# Altium PCB MSW_V2.PcbDoc
Units mil, origin at the board's own origin, x right, y up, seen from the top; angles counter-clockwise.
Board outline 1575 x 1330 mil, 2 copper layers (Top Layer, Bottom Layer); 79 components, 42 nets, 260 pads, 33 vias.
Unrouted connection lines stored in the file: 63.
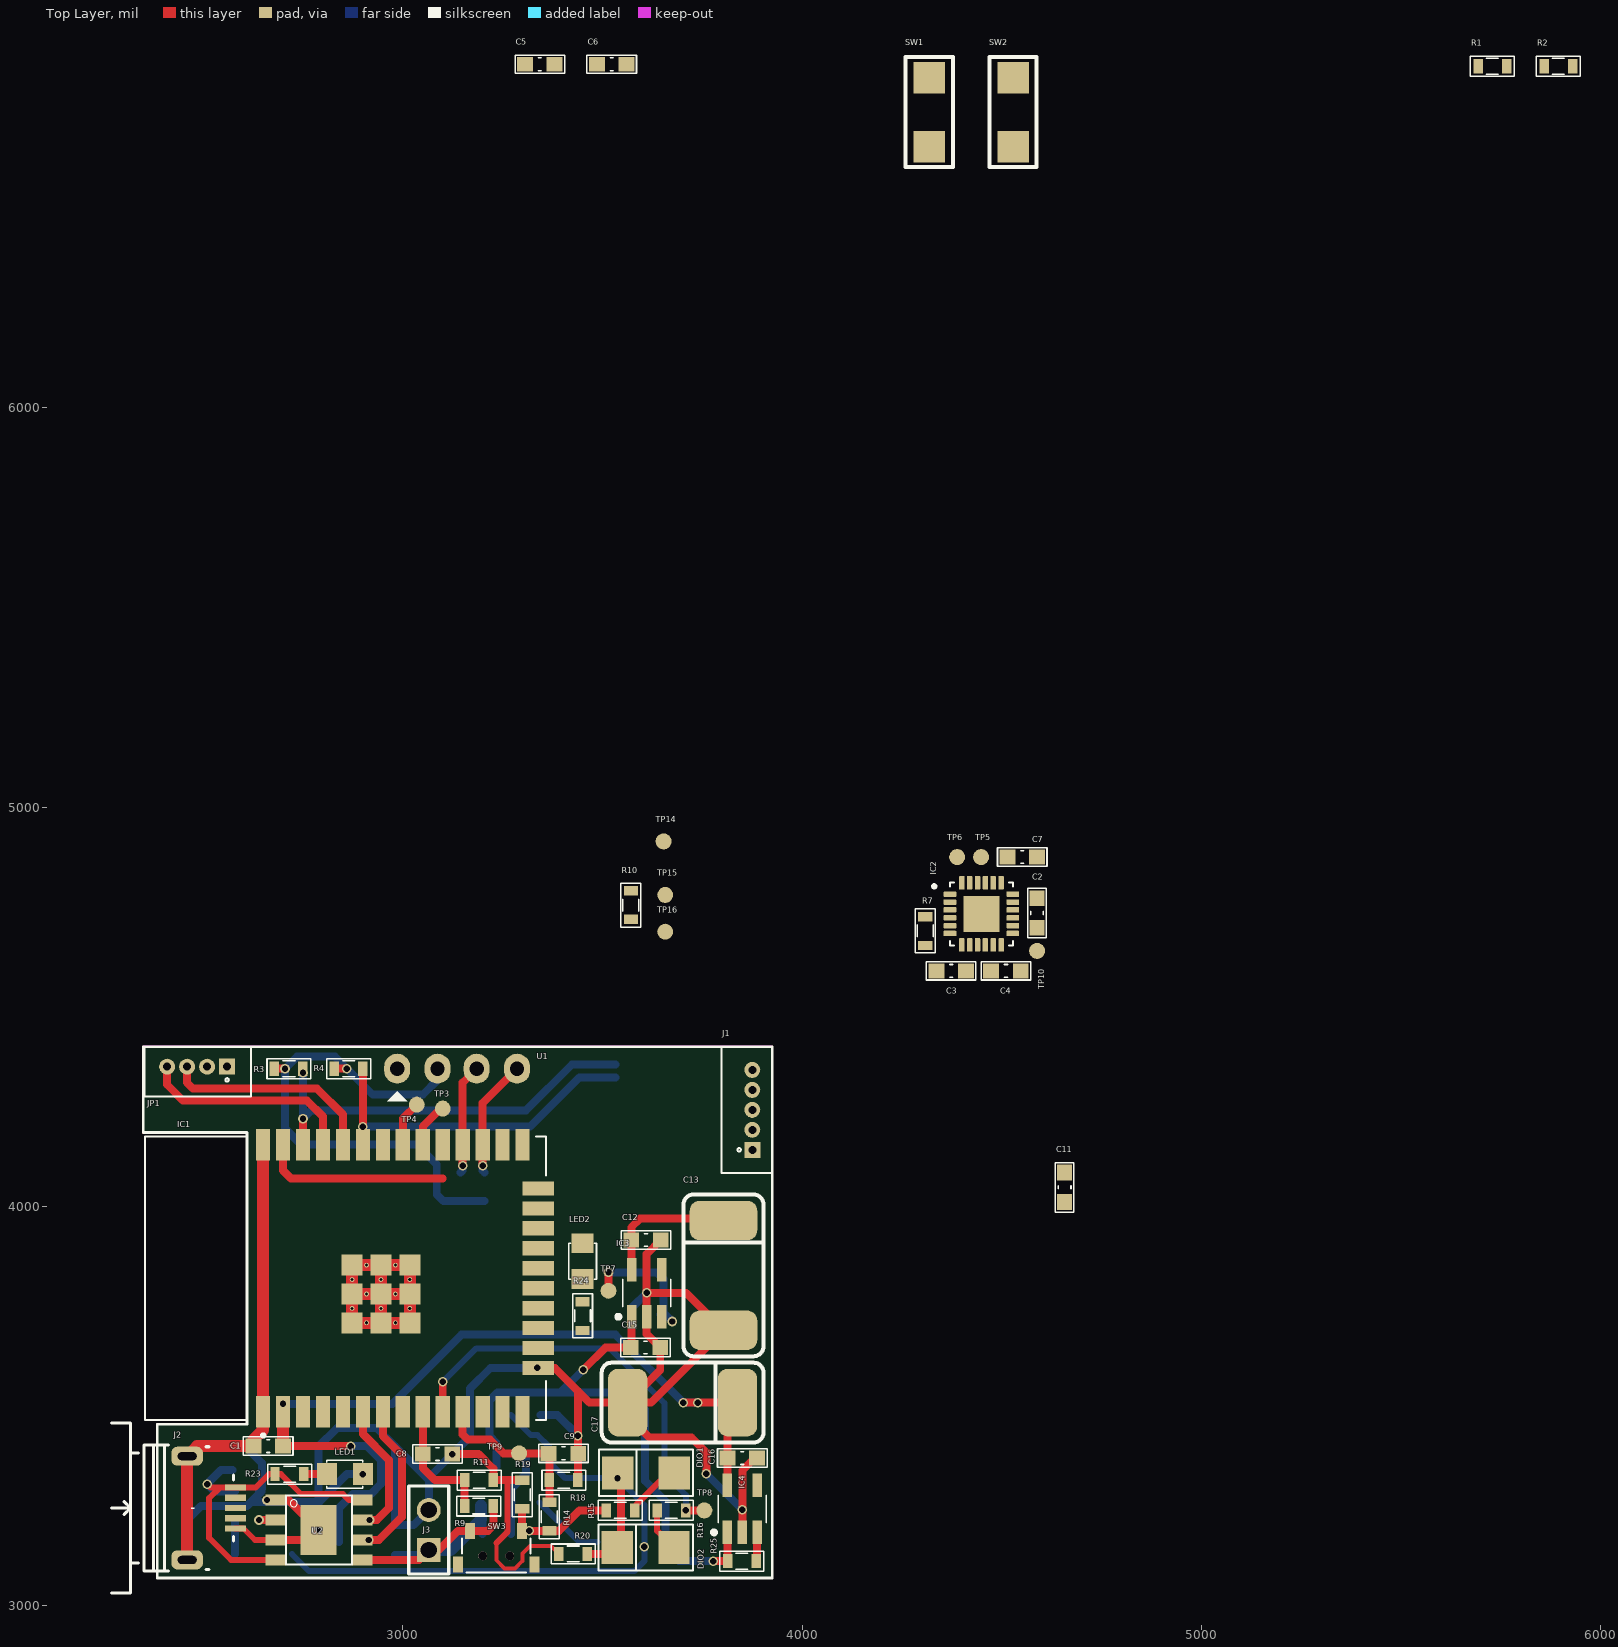
[diagram p0: Top Layer view]
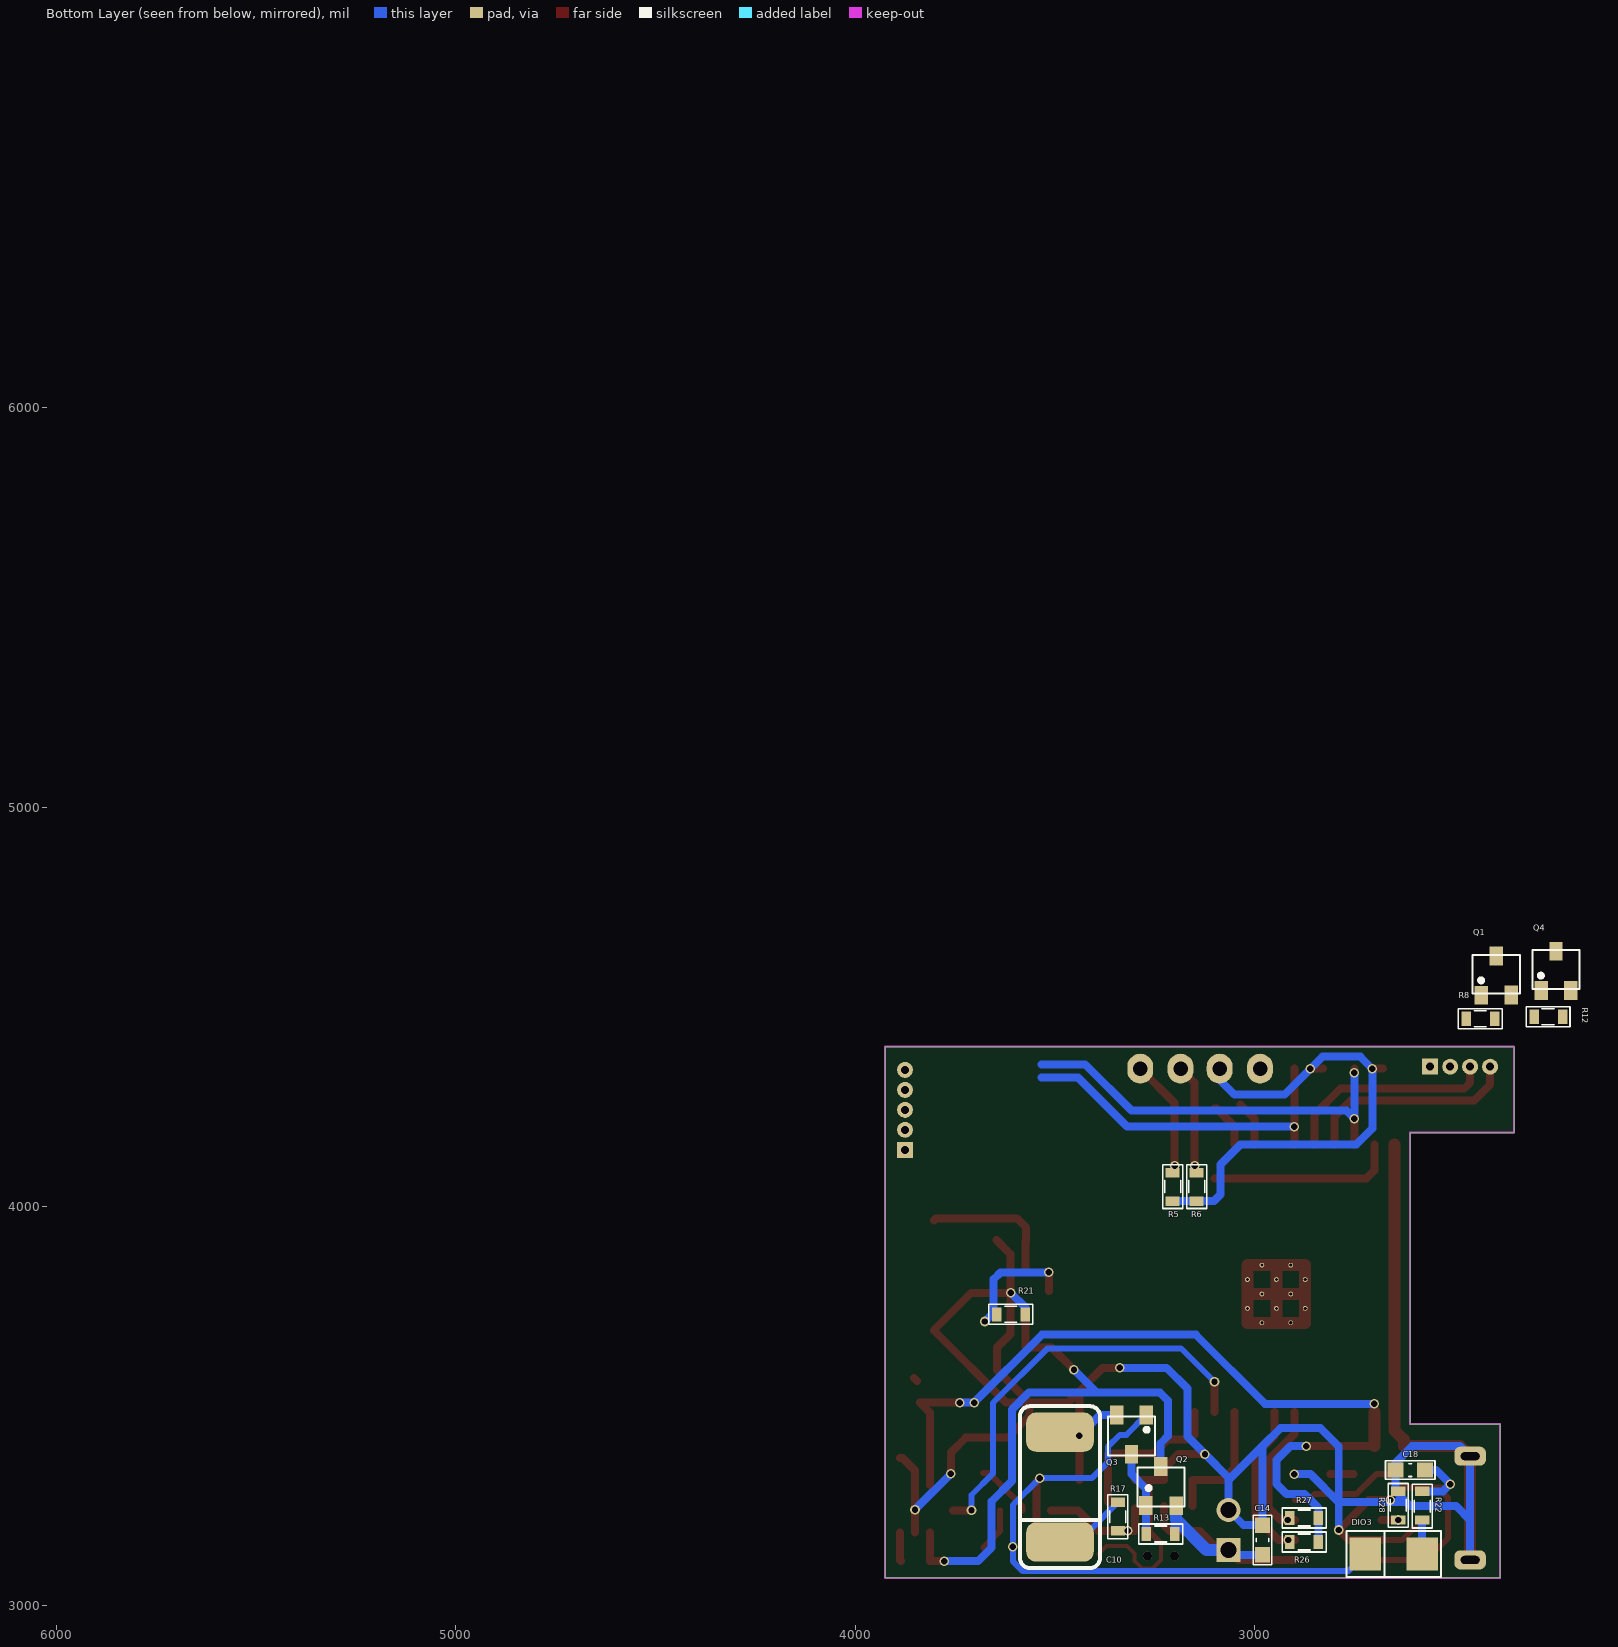
[diagram p1: Bottom Layer view, seen from below]

## Layer stack, top to bottom
Top Solder: solder mask 0.4, Solder Resist, Dk 3.5
Top Layer: signal copper 1.4
Dielectric 1: dielectric 12.6, FR-4, Dk 4.8
Bottom Layer: signal copper 1.4
Bottom Solder: solder mask 0.4, Solder Resist, Dk 3.5

## Board outline
2350,4185 2350,4400 3925,4400 3925,3070 2385,3070 2385,3455 2610,3455 2610,4185

## Design rules (kind name [scope] priority, off if disabled: settings)
Clearance [All] p1: gap=20 ignorepadtopadclearanceinfootprint=TRUE except(0: Arc-Hole Track-Hole SMDPad-Hole THPad-Hole Via-Hole Fill-Hole Poly-Hole Region-Hole Text-Hole; 1: Arc-Text Track-Text SMDPad-Text THPad-Text Via-Text Fill-Text Poly-Text Region-Text Text-Text; 7: Arc-Arc Arc-Track Track-Track; 10: Arc-SMDPad Track-SMDPad SMDPad-SMDPad; 15: Arc-THPad Arc-Via Track-THPad Track-Via SMDPad-THPad SMDPad-Via THPad-THPad THPad-Via Via-Via)
PolygonConnect [All] p1: connectstyle=Relief reliefconductorwidth=15 reliefentries=4 polygonreliefangle="45 Angle" airgapwidth=10
RoutingVias [All] p1: holewidth=16 width=24 viastyle="Through Hole" minholewidth=16 minwidth=24 maxholewidth=16 maxwidth=24
SolderMaskExpansion [All] p1: expansion=4 istentingtop=FALSE
Width [All] p1: maxlimit=40 minlimit=10 preferedwidth=20
30 further rules are at their usual default settings.

## Components (designator, comment, footprint, x,y, rotation, side; value= is the part's Value field where it differs from the comment)
C1 "10uF" CAP_0603 2663,3400 r0 top value=33p
C2 "100nF" CAP_0603 4588,4735 r270 top value=33p
C3 "10nF" CAP_0603 4373,4590 r0 top value=33p
C4 "100nF" CAP_0603 4510,4590 r180 top value=33p
C5 "10uF" CAP_0603 3343.06,6860 r0 top value=33p
C6 "10uF" CAP_0603 3523.06,6860 r0 top value=33p
C7 "2.2nF" CAP_0603 4551,4875 r180 top value=33p
C8 "10uF" CAP_0603 3087,3380 r180 top value=33p
C9 "10uF" CAP_0603 3402,3382 r180 top value=33p
C10 "220uF/10V" CAP_7343 3487,3295 r90 bottom
C11 "10uF" CAP_0603 4657,4048 r90 top value=33p
C12 "10uF" CAP_0603 3609,3916 r180 top value=33p
C13 "220uF/10V" CAP_7343 3803,3830 r270 top
C14 "10uF" CAP_0603 2980,3165 r270 bottom value=33p
C15 "10uF" CAP_0603 3607.6,3647.06 r180 top value=33p
C16 "10uF" CAP_0603 3850,3370 r180 top value=33p
C17 "220uF/10V" CAP_7343 3703,3509 r180 top
C18 "10uF" CAP_0603 2610,3340 r180 bottom value=33p
DIO1 "SS34" DIO-214AC(SMA) 3606,3335 r0 top value=1N5007
DIO2 "SS34" DIO-214AC(SMA) 3605,3148 r0 top value=1N5007
DIO3 "SS34" DIO-214AC(SMA) 2654,3132 r180 bottom value=1N5007
IC1 "ESP32-WROOM-32" MODULE_ESP32-WROOM-32 2857.09,3820.35 r90 top
IC2 "MPU6050" QFN24 4448.79,4732.76 r0 top
IC3 "RT9013" SOT23-5 3610.6,3783.06 r90 top
IC4 "RT9013" SOT23-5 3850,3243.06 r90 top
J1 "JP5" "Header5 - TH - 1.25MM" 3875,4142 r90 top
J2 "USB-5" USB-M4 2460,3245 r270 top
J3 "JP2" JP2-C1T 3065,3140 r90 top
JP1 "JP4" "Header4 - TH - 1.25MM" 2560,4350 r180 top
LED1 "LED" LED-0805-Red 2810,3330 r0 top value="LED 3 ly Single Colour"
LED2 "LED" LED-0805-Blue 3450,3818 r90 top value="LED 3 ly Single Colour"
Q1 "2SC1815" SOT23D 2394.5,4578.16 r180 bottom value=C1815
Q2 "AO3401" SOT23A 3235,3300 r180 bottom
Q3 "2SC1815" SOT23D 3308,3429 r0 bottom value=C1815
Q4 "2SC1815" SOT23D 2245,4590 r180 bottom value=C1815
R1 "10k" RES-SMD-0603 5728.06,6855 r0 top
R2 "10k" RES-SMD-0603 5893.06,6855 r0 top
R3 "10k" RES-SMD-0603 2715,4345 r180 top
R4 "10k" RES-SMD-0603 2865,4345 r180 top
R5 "10k" RES-SMD-0603 3205,4050 r270 bottom
R6 "10k" RES-SMD-0603 3145,4050 r270 bottom
R7 "10k" RES-SMD-0603 4308,4690 r270 top
R8 "10k" RES-SMD-0603 2435,4470 r180 bottom
R9 "500k" RES-SMD-0603 3190,3250 r0 top
R10 "10k" RES-SMD-0603 3571,4754 r90 top
R11 "1M5" RES-SMD-0603 3191.49,3315 r180 top
R12 "10k" RES-SMD-0603 2265,4475 r180 bottom
R13 "150k" RES-SMD-0603 3235,3180 r0 bottom
R14 "500k" RES-SMD-0603 3367,3223 r90 top
R15 "10k" RES-SMD-0603 3544.51,3239 r0 top
R16 "10k" RES-SMD-0603 3672,3239 r0 top
R17 "150k" RES-SMD-0603 3342,3223 r90 bottom
R18 "1M5" RES-SMD-0603 3403.48,3315.01 r180 top
R19 "150k" RES-SMD-0603 3299,3278.51 r90 top
R20 "150k" RES-SMD-0603 3427,3130 r180 top
R21 "150k" RES-SMD-0603 3610,3730 r180 bottom
R22 "10k" RES-SMD-0603 2580,3250 r90 bottom
R23 "2k" RES-SMD-0603 2716.49,3330 r180 top
R24 "2k" RES-SMD-0603 3450,3726 r270 top
R25 "150k" RES-SMD-0603 3849,3112 r0 top
R26 "150k" RES-SMD-0603 2875,3160 r0 bottom
R27 "150k" RES-SMD-0603 2875,3220 r0 bottom
R28 "1k2" RES-SMD-0603 2640,3251.49 r270 bottom
SW1 "SW" "SW 3x2x4" 4318.06,6740 r90 top value="SW chip 2 pin"
SW2 "SW" "SW 3x2x4" 4528.06,6740 r90 top value="SW chip 2 pin"
SW3 "SW" "BUTTON 2P SMD SIDE 2x4x3.5" 3234,3125 r0 top value="SW chip 2 pin"
TP3 "TP" TP_SMD 3100,4245 r90 top
TP4 "TP" TP_SMD 3035,4255 r90 top
TP5 "TP" TP_SMD 4448,4875 r90 top
TP6 "TP" TP_SMD 4388,4875 r90 top
TP7 "TP" TP_SMD 3515,3789 r90 top
TP8 "TP" TP_SMD 3755,3239 r90 top
TP9 "TP" TP_SMD 3291,3382 r90 top
TP10 "TP" TP_SMD 4588,4640 r90 top
TP14 "TP" TP_SMD 3653,4914 r180 top
TP15 "TP" TP_SMD 3657,4780 r180 top
TP16 "TP" TP_SMD 3657,4688 r180 top
U1 "SSD1306" "OLED 1.3 SSD1306 NON POLE" 3138.91,3755.02 r0 top locked
U2 "TP4056" TP4056 2790,3190 r0 top

## Footprints (in the part's own frame and the unit in brackets; to place one, negate y for a bottom-side part, rotate by r counter-clockwise, add the part's x,y. Pads: shape width x height; smd on the part's side, far side on the other; paste and mask are expansions set on the pad)
"BUTTON 2P SMD SIDE 2x4x3.5" [mil]
  round 22 hole 22: 0(-34,0) 0(34,0)
  rect 25x40 smd: 1(65,63) 2(-66,63) 3(-96,-21) 3(96,-21)
  silkscreen extent -86,-42 86,44, body extent -93,-83 93,61, height 76
CAP_0603 [mm]
  rect 1x0.95 smd mask+0.076: 1(-0.94,0) 2(0.94,0)
  silkscreen extent -1.57,-0.58 1.57,0.58, body extent -0.77,-0.39 0.83,0.41, height 0.9
CAP_7343 [mm] "Capacitor Tantalum 7343"
  rrect50% 2.5x4.3 smd: 1(-3.429,0) 2(3.556,0)
  silkscreen extent -5.08,-2.54 5.21,2.54, body extent -3.75,-2.14 3.75,2.16, height 2.8
DIO-214AC(SMA) [mm] "DO-214AC Diode Smallest Size"
  rect 2x2.1 smd: 1(1.88,-0.051) 2(-1.732,-0.051)
  silkscreen extent -2.92,-1.52 3.07,1.42, body extent -2.5,-1.35 2.7,1.25, height 2.4
"Header4 - TH - 1.25MM" [mil] "CON4"
  rect 40x40 hole 20: 1(0,0)
  round 40 hole 20: 2(50,0) 3(100,0) 4(150,0)
  silkscreen extent -60,-50 207,75, body extent -59,-50 206,76, height 185
"Header5 - TH - 1.25MM" [mil] "CON5"
  rect 40x40 hole 20: 1(0,0)
  round 40 hole 20: 2(50,0) 3(100,0) 4(150,0) 5(200,0)
  silkscreen extent -58,-49 258,77, body extent -57,-49 257,77, height 185
JP2-C1T [mm] "2 row, straight, gold plating"
  rect 1.52x1.52 hole 1.02: 1(0,0)
  round 1.52 hole 1.02: 2(2.54,0)
  silkscreen extent -1.52,-1.27 4.06,1.27, body extent -1.52,-1.25 4.06,1.25, height 8.51
LED-0805-Blue [mil]
  rect 50x55 smd: 1(0,0) 2(90,0)
  silkscreen extent 0,-35 90,35, body extent 5,-25 85,25, height 43
LED-0805-Red [mil]
  rect 50x55 smd: 1(0,0) 2(90,0)
  silkscreen extent 0,-35 90,35, body extent 5,-25 85,25, height 43
MODULE_ESP32-WROOM-32 [mm]
  rect 2x0.9 smd: 1(-8.5,5.26) 2(-8.5,3.99) 3(-8.5,2.72) 4(-8.5,1.45) 5(-8.5,0.18) 6(-8.5,-1.09) 7(-8.5,-2.36) 8(-8.5,-3.63) 9(-8.5,-4.9) 10(-8.5,-6.17) 11(-8.5,-7.44) 12(-8.5,-8.71) 13(-8.5,-9.98) 14(-8.5,-11.25) 25(8.5,-11.25) 26(8.5,-9.98) 27(8.5,-8.71) 28(8.5,-7.44) 29(8.5,-6.17) 30(8.5,-4.9) 31(8.5,-3.63) 32(8.5,-2.36) 33(8.5,-1.09) 34(8.5,0.18) 35(8.5,1.45) 36(8.5,2.72) 37(8.5,3.99) 38(8.5,5.26)
  rect 0.9x2 smd: 15(-5.715,-12.25) 16(-4.445,-12.25) 17(-3.175,-12.25) 18(-1.905,-12.25) 19(-0.635,-12.25) 20(0.635,-12.25) 21(1.905,-12.25) 22(3.175,-12.25) 23(4.445,-12.25) 24(5.715,-12.25)
  rect 1.33x1.33 smd: 39_1(-2.835,-0.405) 39_2(-1,-0.405) 39_3(0.835,-0.405) 39_4(-2.835,-2.24) 39_5(-1,-2.24) 39_6(0.835,-2.24) 39_7(-2.835,-4.075) 39_8(-1,-4.075) 39_9(0.835,-4.075)
  round 0.3 hole 0.2: 39_10(-1.917,-0.405) 39_11(-0.082,-0.405) 39_12(-2.835,-1.322) 39_13(-1,-1.322) 39_14(0.835,-1.322) 39_15(-1.917,-2.24) 39_16(-0.082,-2.24) 39_17(-2.835,-3.157) 39_18(-1,-3.157) 39_19(0.835,-3.157) 39_20(-1.917,-4.075) 39_21(-0.082,-4.075)
  silkscreen extent -10.1,-12.75 9,12.75, body extent -9.02,-12.75 8.98,12.75, height 3.2
"OLED 1.3 SSD1306 NON POLE" [mil]
  oval 65x75 hole 36: 1(-152.91,589.98) 2(-51.91,589.98) 3(46.09,589.98) 4(147.09,589.98)
  silkscreen extent -178,509 -128,534, body extent -659,-687 660,640, height 553
QFN24 [mm]
  rrect25% 0.8x0.35 smd: 1(-2,1.25) 2(-2,0.75) 3(-2,0.25) 4(-2,-0.25) 5(-2,-0.75) 6(-2,-1.25) 13(2,-1.25) 14(2,-0.75) 15(2,-0.25) 16(2,0.25) 17(2,0.75) 18(2,1.25)
  rrect25% 0.35x0.85 smd: 7(-1.25,-1.975) 8(-0.75,-1.975) 9(-0.25,-1.975) 10(0.25,-1.975) 11(0.75,-1.975) 12(1.25,-1.975) 19(1.25,1.975) 20(0.75,1.975) 21(0.25,1.975) 22(-0.25,1.975) 23(-0.75,1.975) 24(-1.25,1.975)
  rect 2.286x2.286 smd paste-2: 25(0,0)
  silkscreen extent -3.1,-2 2,2, body extent -2,-2.01 2.01,2.01, height 0.9
RES-SMD-0603 [mm]
  rect 0.6x0.9 smd: 1(-0.889,0) 2(0.927,0)
  silkscreen extent -1.4,-0.64 1.4,0.64, body extent -0.8,-0.4 0.8,0.4, height 0.43
SOT23-5 [mm] "SOT23, 5-Leads, Body 3.0x3.0mm (max), Pitch 0.95mm, IPC Medium Density"
  rect 1.5x0.6 smd: 1(-1.5,0.95) 2(-1.5,0) 3(-1.5,-0.95) 4(1.5,-0.95) 5(1.5,0.95)
  silkscreen extent -1.62,-1.52 0.87,1.92, body extent -1.75,-1.52 1.75,1.53, height 1.45
SOT23A [mm] "SOT 23A"
  rect 0.85x1.2 smd: 1(-0.94,-1.245) 2(0.005,1.25) 3(0.985,-1.25)
  silkscreen extent -1.47,-1.3 1.52,1.17, body extent -1.5,-1.3 1.5,1.2, height 1.06
SOT23D [mm] "SOT 23C - 1-3-2 - BCE"
  rect 0.85x1.2 smd: 1(-0.95,-1.25) 2(0.94,-1.245) 3(0,1.25)
  silkscreen extent -1.5,-1.14 1.5,1.32, body extent -1.5,-1.17 1.5,1.33, height 1.06
"SW 3x2x4" [mm]
  rect 2x2 smd: 1(-2.2,0) 2(2.2,0)
  silkscreen extent -3.5,-1.5 3.5,1.5, body extent -2.45,-1.45 2.45,1.45, height 2
TP4056 [mm]
  rect 1.3x0.7 smd: 1(-2.75,1.905) 2(-2.75,0.635) 3(-2.75,-0.635) 4(-2.75,-1.905) 5(2.75,-1.905) 6(2.75,-0.635) 7(2.75,0.635) 8(2.75,1.905)
  rect 2.3x3.2 smd: 3(-0.025,0)
  silkscreen extent -2.1,-2.2 2.1,2.2, body extent -3.13,-2.45 2.87,2.45, height 1.75
TP_SMD [mil]
  round 40 smd: 1(0,0)
USB-M4 [mm]
  rect 0.4x1.35 smd mask+0.05: 1(-1.3,3.069) 2(-0.65,3.069) 3(0,3.069) 4(0.65,3.069) 5(1.3,3.069)
  rrect60% 1.2x2 hole 0.5 slot 1.2 at 90 deg: 5(-3.3,0) 5(3.3,0)
  silkscreen extent -5.4,-4.8 5.4,2.95, body extent -3.93,-2.76 3.93,2.9, height 2.85

## Part data
C1 C2 C3 C4 C5 C6 C7 C8 C9 C11 C12 C14 C15 C16 C18: library part CapSMD, "Capacitor", LatestRevisionDate=17-Jul-2002, LatestRevisionNote="Re-released for DXP Platform.", PackageReference=RAD-0.3, Published=8-Jun-2000, Publisher="Altium Limited"
C10 C13 C17: library part CAP_TAN_SMD, "Polazied Tantalum Capacitor"
DIO1 DIO2 DIO3: library part "Diode SMD", "Default Diode", Code - JEDEC=DO-214-AB, Published=8-Jun-2000, Publisher="Altium Limited", Revision="July-2002: Re-released for DXP Platform."
IC1: "Bluetooth, WiFi Transceiver Module 2.4GHz ~ 2.5GHz Surface Mount", Package="Module Espressif Systems", Digi-Key_Part_Number=1904-1010-1-ND, Digi-Key_Purchase_URL=https://www.digikey.com/product-detail/en/espressif-systems/ESP32-WROOM-32/1904-1010-1-ND/8544305?utm_source=snapeda&utm_medium=aggregator&utm_campaign=symbol, MF="Espressif Systems", MP=ESP32-WROOM-32, SnapEDA_Link=https://www.snapeda.com/parts/ESP32-WROOM-32/Espressif%20Systems/view-part/2753322/?ref=snap
IC2: library part MPU6050_Chip, "3-axis gyroscope, 3-axis accelerometer"
IC3 IC4: "RT9013-33GB IC REG LINEAR 3.3V 500mA SOT23-5"
J1: library part JP5x1, "WR-PHD 2.54 mm Angled Socket Header", Manufacturer="W¨¹rth Elektronik eiSos GmbH", partNo=613005143121, ComponentLink1 Description=Manufacturer, ComponentLink1URL=http://www.we-online.com, ComponentLink2 Description=Datasheet, ComponentLink2URL=http://katalog.we-online.de/em/datasheet/6130xx143121.pdf, Created by="Karrer Zheng", Created Date="29 March 2013", NoPins=05
J2: Manufacturer=FCI, Manufacturer Part Number=10118193-0001LF, Supplier Part Number 1=609-4616-1-ND, .Checked PCB=RF, .Checked SCH=MM, .Creator=MM, Category="Connectors, Interconnects", ComponentLink1Description=http://portal.fciconnect.com/Comergent//fci/drawing/10118193.pdf, ComponentLink1URL=http://portal.fciconnect.com/Comergent//fci/drawing/10118193.pdf, Connector Type="USB - micro B", Features="Shielded, Solder Retention", Gender=Receptacle, Ingress Protection=-, Mounting Type="Surface Mount, Right Angle, Horizontal", Number of Contacts=5, Packaging="Cut Tape (CT)", Pricing 1="1=0.46, 10=0.433, 25=0.3712, 50=0.3156, 100=0.3032, 250=0.27224, 500=0.25988 (USD)", RoHS="RoHS Compliant", Specifications="USB 2.0", Stock 1=28642, Supplier 1=Digi-Key
J3: "WR-PHD 2.54 mm Angled Socket Header", Manufacturer="W¨¹rth Elektronik eiSos GmbH", partNo=613002143121, ComponentLink1 Description=Manufacturer, ComponentLink1URL=http://www.we-online.com, ComponentLink2 Description=Datasheet, ComponentLink2URL=http://katalog.we-online.de/em/datasheet/6130xx143121.pdf, Created by="Karrer Zheng", Created Date="29 March 2013", NoPins=02
JP1: "WR-PHD 2.54 mm Angled Socket Header", Manufacturer="W¨¹rth Elektronik eiSos GmbH", partNo=613004143121, ComponentLink1 Description=Manufacturer, ComponentLink1URL=http://www.we-online.com, ComponentLink2 Description=Datasheet, ComponentLink2URL=http://katalog.we-online.de/em/datasheet/6130xx143121.pdf, Created by="Karrer Zheng", Created Date="29 March 2013", NoPins=04
LED1 LED2: "LED Single colour Green and Red"
Q1 Q3 Q4: library part C1815, "NPN 600mW, ECB"
Q2: library part MOSFET_P, "Generic P Channel MOSFET"
R1 R2 R3 R4 R5 R6 R7 R8 R9 R10 R11 R12 R13 R14 R15 R16 R17 R18 R19 R20 R21 R22 R23 R24 R25 R26 R27 R28: library part "Resistor - SMD", "Resistor SMD", Manufacturer="Generic Components", Class=Passive, Published=08/06/2000, Publisher="Altium Hobart Technology Centre"
SW1 SW2 SW3: library part SW2, "Switch button 2 pin"
TP3 TP4 TP5 TP6 TP7 TP8 TP9 TP10 TP14 TP15 TP16: "CONNECT 1"
U1: library part "OLED 1.3 SSD1306", "OLED Display 1.3\" SSD1306"
U2: "Complete single cell Li-Ion battery with a constant current / constant voltage linear charger"

## Via types
v1: diameter 24, hole 16, Top Layer to Bottom Layer, 33 vias

## Nets (pads, with @x,y where several pads share a name; then routed paths per layer and width w, separated by ;. In a path a pad name is that pad's centre, name@x,y a point inside that pad or via, vN(x,y) a via of type N, cw(c..) or ccw(c..) an arc to the next point about the centre after c; other vN are vias at no path point)
BOOT: C6.2 IC1.25 Q4.3 R2.2 SW2.2
BTN: C9.2 IC1.11 R14.2 R18.2 TP9.1 | length 414.5
  Top Layer w20: IC1.11 3150,3429 3163,3416 3218,3416 3252,3382 C9.2 3367,3380 R18.2 R14.2
CHRG: IC1.6 R27.2 U2.7 | length 346.8
  Top Layer w20: U2.7 v1(2916.63,3215) 2935,3215 2965,3245 2965,3365 2900,3430 IC1.6
CTRL_MAIN_PWR: IC1.10 R16.2 TP8.1 | length 1059.5
  Top Layer w20: IC1.10 v1(3100,3561) ; v1(3708.49,3239) TP8.1
  Bottom Layer w15: v1(3100,3561) 3184,3645 3518,3645 3655,3508 3655,3331 3708.49,3277.51 v1(3708.49,3239)
CTRL_SUB_PWR: IC1.37 IC3.3 R21.1 TP7.1 | length 793.1
  Top Layer w20: IC1.37 2700,4090 2720,4070 3100,4070 ; TP7.1 v1(3515,3835)
  Bottom Layer w20: v1(3515,3835) 3636,3835 3653,3818 3653,3738 R21.1 3657,3730 v1(3675,3712)
DTR: JP1.2 Q4.2 R8.2
GND: C1.1 C2.1 C3.1 C4.1 C5.1 C6.1 C7.1 C8.1 C9.1 C10.2 C11.1 C12.1 C13.2 C14.1 C15.1 C16.1 C17.2 C18.1 IC1.1 IC1.15 IC1.38 IC1.39_1 IC1.39_2 IC1.39_3 IC1.39_4 IC1.39_5 IC1.39_6 IC1.39_7 IC1.39_8 IC1.39_9 IC1.39_10 IC1.39_11 IC1.39_12 IC1.39_13 IC1.39_14 IC1.39_15 IC1.39_16 IC1.39_17 IC1.39_18 IC1.39_19 IC1.39_20 IC1.39_21 IC2.1 IC2.9 IC2.11 IC2.18 IC2.25 IC3.2 IC4.2 J1.2 J2.5 J3.2 LED1.2 Q3.2 R11.1 R18.1 R19.2 R20.2 R21.2 R28.1 SW1.1 SW2.1 U1.1 U2.1 U2.3 | length 7900.4
  Top Layer w10: 3234,3157 3234,3115.16 3255.16,3094 3281,3094 3300,3113 3300,3131 3319,3150 3370.5,3150 R20.2
  Top Layer w15: J2.5@2580.82,3193.82 2601.18,3193.82 2630,3165 U2.3@2681.73,3165 ; 3234,3157 3262.74,3185.74 3262.74,3315
  Top Layer w20: v1(2660,3265) U2.1 2714,3265 v1(2789,3190) 2764,3165 U2.3@2681.73,3165 ; v1(3124,3380) 3190,3380 3226.49,3343.51 R11.1 3262.74,3315 R19.2 ; IC1.15 3380.65,3595.35 3438.49,3537.51 ; R18.1 v1(3438.49,3426.26) 3438.49,3537.51 ; C12.1 3610.6,3880.6 v1(3610.6,3784) ; v1(3760,3331) 3760,3384 3723,3421 3618,3421 3563,3476 C17.2 ; IC4.2 v1(3850,3241) 3850,3339 3881,3370 C16.1 ; 3438.49,3537.51 3467,3509 C17.2 ; C17.2 3644.6,3590.6 C15.1 3610.6,3681.06 IC3.2 v1(3610.6,3784) ; C17.2 3622,3509 C13.2 3709,3784 v1(3610.6,3784)
  Top Layer w30: J2.5@2460,3115.08 2460,3374.92 2485.08,3400 C1.1 2626,3416 2650,3440 IC1.1 IC1.38 ; IC1.39_2 IC1.39_13 IC1.39_5 ; IC1.39_2 IC1.39_11 IC1.39_3 IC1.39_14 IC1.39_6 ; IC1.39_2 IC1.39_10 IC1.39_1 IC1.39_12 IC1.39_4 ; IC1.39_4 IC1.39_15 IC1.39_5 ; IC1.39_4 IC1.39_17 IC1.39_7 IC1.39_20 IC1.39_8 ; IC1.39_5 IC1.39_16 IC1.39_6 ; IC1.39_5 IC1.39_18 IC1.39_8 ; IC1.39_6 IC1.39_19 IC1.39_9 IC1.39_21 IC1.39_8
  Bottom Layer w20: J2.5@2460,3115.08 2460,3215 ; R28.1 2647,3293.49 C18.1 2647,3358 2605,3400 2485.08,3400 2460,3374.92 2460,3215 ; R28.1@2646.49,3286.49 2620,3260 ; v1(2789,3190) 2789,3259 ; v1(2900,3330) 2860,3330 2789,3259 ; v1(3337,3596) 3220,3596 3168,3544 3168,3424 v1(3124,3380) 3065,3321 3065,3315 ; Q3.2 3386.75,3478 v1(3438.49,3426.26) ; R21.2 3573.51,3746.91 v1(3610.6,3784) ; v1(3760,3331) v1(3850,3241) ; 2460,3215 2495,3250 2610,3250 2620,3260 ; 2620,3260 2788,3260 2789,3259 ; 2789,3259 2789,3399 2835,3445 2935,3445 2980,3400 ; 2980,3400 3065,3315 ; 2980,3400 C14.1 3027,3202 J3.2 3065,3315
LED: IC1.26 LED2.2
MAX_INT: IC1.8 J1.5 R10.2 TP16.1
MAX_SCL: IC1.33 J1.3 R4.1 TP14.1 | length 873.9
  Top Layer w20: IC1.33 v1(2900,4200) R4.1
  Bottom Layer w20: v1(2900,4200) 3319,4200 3442,4323 3533,4323
MAX_SDA: IC1.36 J1.4 R3.1 TP15.1 | length 1029.3
  Top Layer w20: IC1.36 v1(2750,4220) ; v1(2750,4335) R3.1
  Bottom Layer w20: v1(2750,4335) v1(2750,4220) 2770,4240 3308,4240 3424,4356 3533,4356
MPU_INT: IC1.12 IC2.12 R7.2 TP10.1
MPU_SCL: IC1.28 IC2.23 R6.1 TP5.1 U1.3 | length 276.6
  Top Layer w20: v1(3150,4102) IC1.28 3150,4310 U1.3
  Bottom Layer w20: R6.1 3150,4090 v1(3150,4102)
MPU_SDA: IC1.27 IC2.24 R5.1 TP6.1 U1.4 | length 297.7
  Top Layer w20: v1(3200,4102) IC1.27 3200,4259 U1.4
  Bottom Layer w20: v1(3200,4102) 3200,4090 R5.1
NetC4_2: C4.2 IC2.10
NetC7_2: C7.2 IC2.20
NetC10_1: C10.1 R17.2 | length 186.2
  Bottom Layer w15: R17.2 3441.5,3160 C10.1
NetDIO1_1: DIO1.1 R15.2 | length 143.8
  Top Layer w15: R15.2 3581,3249 3665,3333 DIO1.1
NetDIO2_1: DIO2.1 R16.1 | length 110.4
  Top Layer w15: R16.1 3637,3188 DIO2.1
NetDIO3_1: DIO3.1 R22.1 | length 85
  Bottom Layer w20: DIO3.1 R22.1
NetIC1_30: IC1.30 TP3.1 | length 113.6
  Top Layer w20: IC1.30 3050,4200 3095,4245 TP3.1
NetIC1_31: IC1.31 TP4.1 | length 114.5
  Top Layer w20: IC1.31 3000,4220 TP4.1
NetIC4_3: IC4.3 R25.2 | length 73.2
  Top Layer w20: R25.2@3884.49,3112 3887.4,3114.91 IC4.3
NetLED1_1: LED1.1 R23.1 | length 58.5
  Top Layer w20: R23.1 LED1.1
NetLED2_1: LED2.1 R24.1
NetQ1_1: Q1.1 R8.1
NetQ2_1: Q2.1 Q3.3 R13.2 | length 214.9
  Bottom Layer w20: R13.2 3271.49,3250.49 Q2.1 3272,3294 3308,3330 Q3.3
NetQ4_1: Q4.1 R12.1
NetR14_1: R14.1 R15.1 R17.1 R19.1 SW3.1 | length 312.1
  Top Layer w20: R19.1 SW3.1 v1(3317,3188) R14.1 3391,3188 3442,3239 R15.1
  Bottom Layer w20: v1(3317,3188) R17.1
NetR28_2: R28.2 U2.2 | length 41.7
  Top Layer w20: v1(2640,3215) U2.2
PWR_KEY: DIO1.2 DIO2.2 DIO3.2 Q3.1 R20.1 | length 1764.4
  Top Layer w20: R20.1 3520.8,3130 DIO2.2 3546,3155.2 3546,3311.58 v1(3537.58,3320)
  Bottom Layer w15: DIO3.2 2765.2,3087 3580,3087 3605,3112 v1(3605,3148) 3605,3252.58 v1(3537.58,3320) 3407.01,3320 3367,3360.02 3367,3398.01 3337,3428 3320.81,3428 Q3.1
RST: C5.2 IC1.3 Q1.3 R1.2 SW1.2
RTS: JP1.1 Q1.2 R12.2
RX0: IC1.34 JP1.3 | length 538.1
  Top Layer w20: JP1.3 2460,4310 2475,4295 2785,4295 2850,4230 IC1.34
STDBY: IC1.7 R26.2 U2.6 | length 406.3
  Top Layer w20: U2.6 v1(2915,3165) 2940,3165 2998,3223 2998,3377 2950,3425 IC1.7
TX0: IC1.35 JP1.4 | length 538.1
  Top Layer w20: JP1.4 2410,4305 2450,4265 2760,4265 2800,4225 IC1.35
V_MAIN: C11.2 C15.2 IC3.1 IC4.1 Q2.2 R25.1 | length 1496.4
  Top Layer w20: v1(3452,3591) 3508.06,3647.06 C15.2 3573.2,3649.65 IC3.1 ; v1(3777,3112) 3812.2,3112 R25.1@3812.6,3112.4 ; IC4.1 R25.1@3812.6,3112.4 ; R25.1@3813,3112 R25.1@3812.6,3112.4
  Bottom Layer w20: Q2.2 3234.8,3407.2 3217,3425 3217,3514 3237,3534 3395,3534 ; v1(3452,3591) 3395,3534 ; v1(3777,3112) 3692,3112 3658,3146 3658,3262 3607,3313 3607,3492 3565,3534 3395,3534
VBAT: C14.2 J3.1 Q2.3 R9.2 R13.1 SW3.2 U2.5 | length 772.2
  Top Layer w20: U2.5 3040,3115 J3.1 3090,3140 3138,3188 SW3.2 3213,3188 3226.49,3201.49 R9.2
  Bottom Layer w20: C14.2 3053,3128 J3.1 ; Q2.3 3200,3246.99 R13.1
  Bottom Layer w30: J3.1 3120,3140 3196.2,3216.2 Q2.3
VBAT_ADC: C8.2 IC1.9 R9.1 R11.2 | length 323.1
  Top Layer w20: IC1.9 C8.2 3050,3345 3080,3315 R11.2 R9.1
VCC1: C1.2 C16.2 C17.1 IC1.2 IC4.5 R1.1 R2.1 R24.2 R26.1 R27.1 | length 2162.8
  Top Layer w20: C1.2 v1(2870,3400) ; v1(3702,3509) v1(3738,3509) C17.1 3813,3484 C16.2 3812.6,3369.6 IC4.5 ; C17.1@3845.49,3563.49 C17.1@3852,3570
  Top Layer w30: C1.2 IC1.2
  Bottom Layer w20: v1(2700,3506) 2974,3506 3147,3679 3532,3679 v1(3702,3509) v1(3738,3509) ; R26.1 R27.1 2840,3245 2875,3280 2920,3280 2945,3305 2945,3365 2910,3400 v1(2870,3400)
VCC2: C2.2 C3.2 C12.2 C13.1 IC2.8 IC2.13 IC3.5 J1.1 R3.2 R4.2 R5.2 R6.2 R7.1 R10.1 U1.2 | length 1652.8
  Top Layer w20: R3.2 v1(2705,4345) ; R4.2 v1(2860,4345) ; IC3.5 3573.2,3914.8 C12.2 3572,3948 3594,3970 3798,3970 C13.1
  Bottom Layer w20: U1.2 3087,4317 3050,4280 2924.99,4280 v1(2860,4345) 2829.99,4375 2735,4375 v1(2705,4345) 2705,4195 2745,4155 3035,4155 3085,4105 3085,4030 3101.49,4013.51 R6.2 R5.2
VCHRG: C18.2 J2.1 R22.2 R23.2 U2.4 U2.8 | length 914.6
  Top Layer w15: v1(2510,3305) 2518.82,3296.18 2541.18,3296.18 ; U2.4 2570,3115 2515,3170 2515,3270 2541.18,3296.18 ; U2.8 2865,3265 2850,3280 2745,3280 2695,3330 R23.2 2665,3330 2631.18,3296.18 J2.1 2541.18,3296.18
  Bottom Layer w20: C18.2 2545,3340 v1(2510,3305) 2528.51,3286.49 R22.2
pads on no net: IC1.4 IC1.5 IC1.13 IC1.14 IC1.16 IC1.17 IC1.18 IC1.19 IC1.20 IC1.21 IC1.22 IC1.23 IC1.24 IC1.29 IC1.32 IC2.2 IC2.3 IC2.4 IC2.5 IC2.6 IC2.7 IC2.14 IC2.15 IC2.16 IC2.17 IC2.19 IC2.21 IC2.22 IC3.4 IC4.4 J2.2 J2.3 J2.4 SW3.0 SW3.3

## Keep-outs
Keep-Out Layer:
  the board outline again, w5

## Silkscreen, mask and mechanical layers (free items; w line width, h text height)
Top Overlay:
  lines w5: 2385,3071 2386,3070
  lines w7: 2385,3070 3925,3070 3925,4400 2350,4400 2350,4185 2610,4185 2610,3467.05 2610,3455 2385,3455 2385,3071

## Text inside footprints (layer, text, board x,y; h text height)
IC1: Mechanical 13 "ANTENNA" at 2502.76,3584.13 h15 r90